# Altium PCB ArgoFCRev2.PcbDoc (part 6 of 6)
Units mm, origin at the board's own origin, x right, y up, seen from the top; angles counter-clockwise.
Board outline 140.21 x 119.63 mm, 4 copper layers (Top Layer, GND Plane, PWR Plane, Bottom Layer), stack 0.603 mm thick; 413 components, 223 nets, 1421 pads, 793 vias.
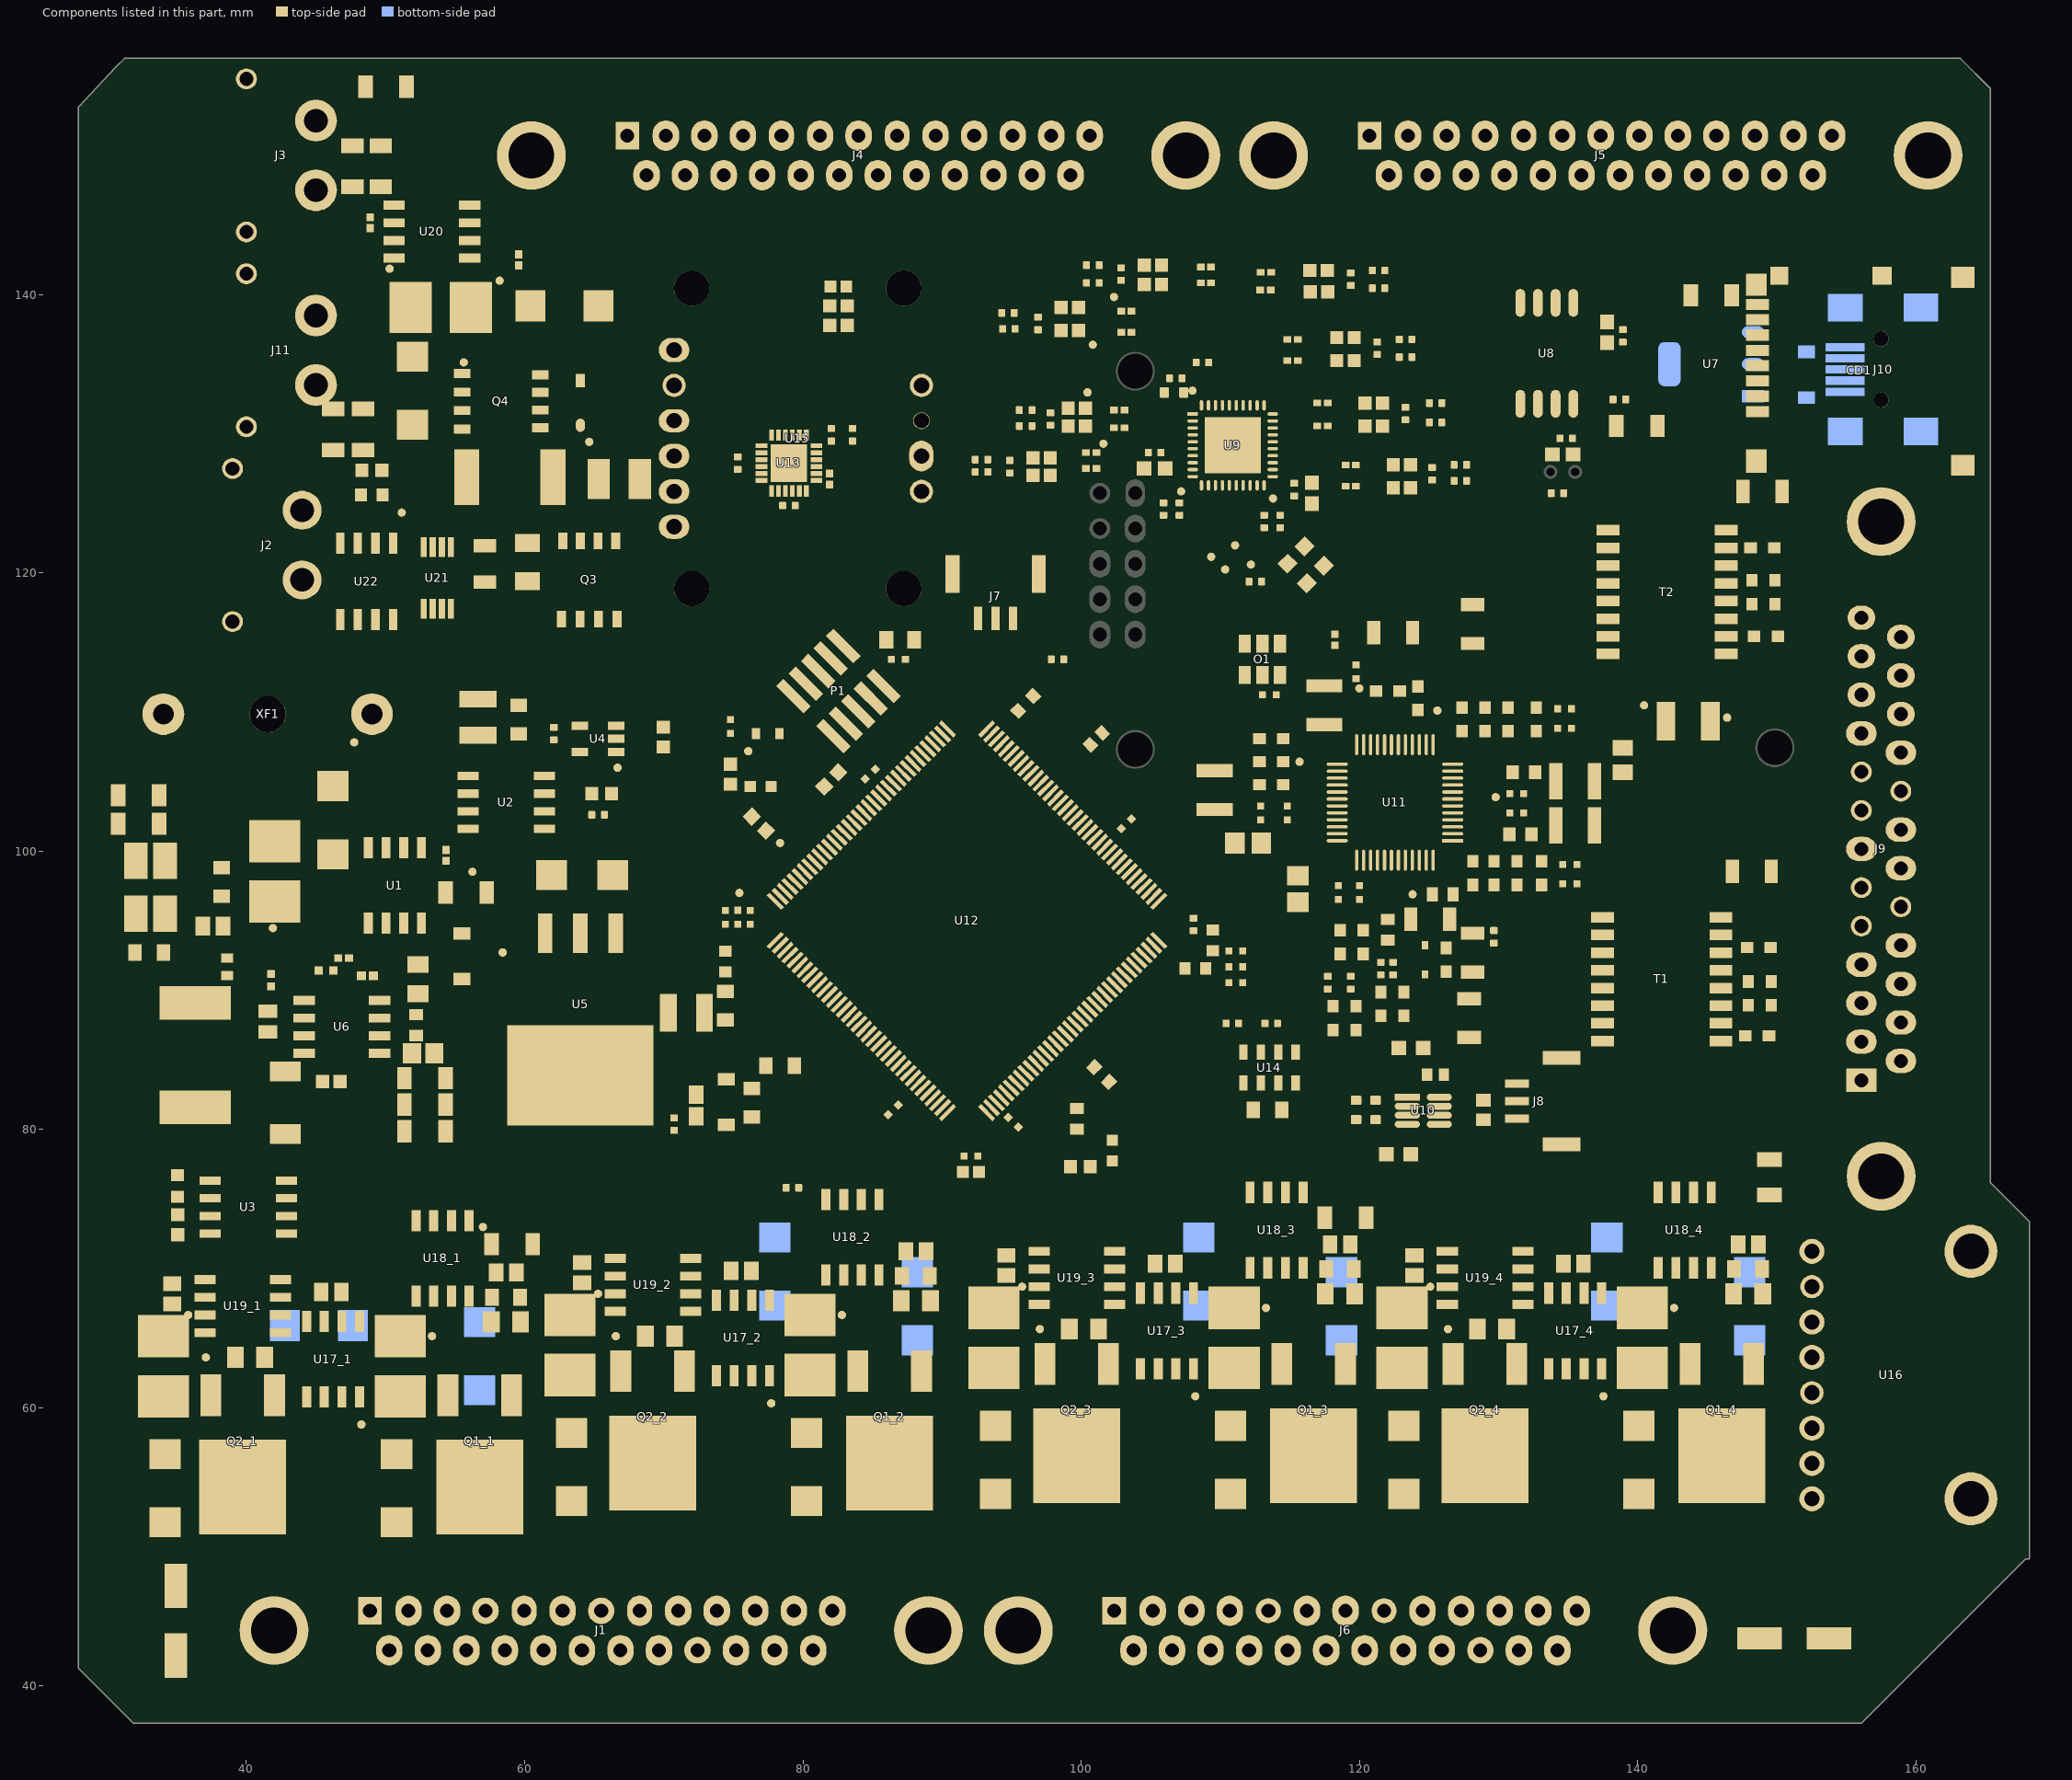
[diagram p7: the components of this part, seen from the top]

## Polygon pours and split planes (outlines as drawn) (continued)
GND on Top Layer "GND_L01_P727" (solid, remove dead copper, pour order 727): 155.293,69.215 161.798,69.215 162.306,68.707 162.306,56.388 161.925,56.007 155.194,56.007 154.813,56.388 154.813,68.675
LOAD_7 on Top Layer "LOAD_7_L01_P694" (solid, remove dead copper, pour order 694): 136.525,53.34 136.525,52.197 131.699,47.371 131.699,44.958 132.588,44.069 136.652,44.069 143.51,50.927 143.51,53.34
LOAD_1 on Top Layer "LOAD_1_L01_P690" (solid, remove dead copper, pour order 690): 60.325,52.959 60.325,50.673 64.008,46.99 64.008,44.704 63.373,44.069 59.436,44.069 58.674,44.831 58.674,46.101 54.61,50.165 54.61,52.959
LOAD_2 on Top Layer "LOAD_2_L01_P689" (solid, remove dead copper, pour order 689): 46.355,52.07 46.355,50.927 50.673,46.609 54.991,46.609 55.626,45.974 55.626,44.831 54.991,44.196 46.99,44.196 39.751,51.435 40.386,52.07 40.767,52.07
LOAD_7 on Top Layer "LOAD_7_L01_P615" (solid, remove dead copper, pour order 615): 142.494,59.817 142.367,59.69 142.367,55.499 141.859,54.991 136.779,54.991 136.525,54.737 136.525,50.292 136.906,49.911 148.717,49.911 149.606,50.8 149.606,59.69 149.479,59.817
LOAD_5 on Top Layer "LOAD_5_L01_P614" (solid, remove dead copper, pour order 614): 113.157,59.817 113.03,59.69 113.03,55.499 112.522,54.991 107.442,54.991 107.188,54.737 107.188,50.927 108.204,49.911 119.253,49.911 120.269,50.927 120.269,59.69 120.142,59.817
LOAD_1 on Top Layer "LOAD_1_L01_P613" (solid, remove dead copper, pour order 613): 53.213,57.785 53.086,57.658 53.086,53.467 52.578,52.959 47.498,52.959 47.244,52.705 47.244,50.927 48.895,49.276 58.928,49.276 60.325,50.673 60.325,57.658 60.198,57.785
LOAD_3 on Top Layer "LOAD_3_L01_P612" (solid, remove dead copper, pour order 612): 82.677,59.309 82.55,59.182 82.55,54.991 82.042,54.483 76.962,54.483 76.708,54.229 76.708,50.038 77.47,49.276 88.9,49.276 89.789,50.165 89.789,59.182 89.662,59.309
LOAD_8 on Top Layer "LOAD_8_L01_P611" (solid, remove dead copper, pour order 611): 125.603,59.817 125.222,59.436 125.222,55.245 122.174,55.245 121.793,54.864 121.793,50.927 123.19,49.53 132.207,49.53 135.636,52.959 135.636,59.563 135.382,59.817
LOAD_6 on Top Layer "LOAD_6_L01_P610" (solid, remove dead copper, pour order 610): 96.266,59.817 95.885,59.436 95.885,55.245 92.837,55.245 92.456,54.864 92.456,52.832 95.504,49.784 105.156,49.784 106.299,50.927 106.299,59.563 106.045,59.817
LOAD_2 on Top Layer "LOAD_2_L01_P609" (solid, remove dead copper, pour order 609): 36.322,57.785 35.941,57.404 35.941,53.213 32.893,53.213 32.766,53.086 32.766,50.927 33.909,49.784 45.212,49.784 46.355,50.927 46.355,57.531 46.101,57.785
LOAD_4 on Top Layer "LOAD_4_L01_P608" (solid, remove dead copper, pour order 608): 65.786,59.309 65.405,58.928 65.405,54.737 62.357,54.737 61.976,54.356 61.976,50.546 63.373,49.149 74.93,49.149 75.819,50.038 75.819,59.055 75.565,59.309
REG_SUPPLY_5V on Top Layer "REG_SUPPLY_5V_L01_P516" (solid, remove dead copper, pour order 516): 54.618,108.974 54.61,108.966 54.61,106.299 54.856,106.053 64.641,106.053 64.895,106.307 64.895,107.323 63.879,108.339 60.952,108.339 60.317,108.974
NetC13_2 on Top Layer "NETC13_2_L01_P721" (solid, remove dead copper, pour order 721): 29.21,85.09 29.21,85.852 29.972,86.614 32.385,86.614 33.909,85.09
STM32VDD on Top Layer "STM32VDD_L01_P646" (solid, remove dead copper, pour order 646): 57.658,79.248 58.42,78.486 67.437,78.486 71.247,82.296 71.247,83.185 57.658,83.185
REG_SUPPLY_5V on Top Layer "REG_SUPPLY_5V_L01_P509" (solid, remove dead copper, pour order 509): 29.21,100.838 29.21,87.63 38.608,87.63 39.624,88.646 39.624,91.059 39.497,91.186 32.893,91.186 32.893,100.584 32.639,100.838
STM32VDD on Top Layer "STM32VDD_L01_P517" (solid, remove dead copper, pour order 517): 63.246,96.139 64.77,96.139 64.897,96.012 64.897,92.202 65.405,91.694 71.374,91.694 71.374,82.296 57.658,82.296 57.658,91.313 58.039,91.694 62.484,91.694 63.119,92.329 63.119,96.012
NetC5_1 on Top Layer "NETC5_1_L01_P700" (solid, remove dead copper, pour order 700): 40.132,100.584 41.91,100.584 43.434,102.108 48.006,102.108 49.149,100.965 49.149,99.187 48.641,98.679 40.132,98.679
NetD13_1 on Top Layer "NETD13_1_L01_P662" (solid, remove dead copper, pour order 662): 53.848,128.397 54.483,129.032 58.293,129.032 58.674,128.651 58.674,123.063 58.547,122.936 58.547,121.412 58.42,121.285 55.88,121.285 55.753,121.412 55.753,125.095 53.848,127
FC_Batt on Top Layer "FC_BATT_L01_P702" (solid, remove dead copper, pour order 702): 52.959,121.158 52.959,122.809 52.959,124.333 52.324,124.968 51.308,124.968 50.927,124.587 50.927,123.444 52.451,121.92 52.451,121.158
FC_Batt on Top Layer "FC_BATT_L01_P656" (solid, remove dead copper, pour order 656): 50.8,136.652 54.229,136.652 55.245,135.636 59.436,135.636 59.817,135.255 59.817,129.54 54.483,129.54 54.102,129.921 54.102,132.588 52.705,132.588 50.8,134.493
FC_Batt on Top Layer "FC_BATT_L01_P710" (solid, remove dead copper, pour order 710): 30.988,140.081 29.591,138.684 29.591,106.045 29.845,105.791 36.576,105.791 41.783,110.998 41.783,121.158 43.434,122.809 44.45,122.809 47.371,125.73 47.371,128.016 43.053,132.334 43.053,134.493 46.736,138.176 46.736,140.081
FC_Batt on Top Layer "FC_BATT_L01_P658" (solid, pour order 658): 30.988,140.081 30.988,135.382 46.101,135.382 48.514,132.969 53.721,132.969 53.721,135.001 52.07,136.652 50.165,136.652 49.657,137.16 49.657,140.081
NetD14_2_1 on Top Layer "NETD14_2_1_L01_P544" (solid, remove dead copper, pour order 544): 69.596,65.532 69.596,62.484 70.739,61.341 72.263,61.341 72.517,61.595 72.517,65.405 72.009,65.913 69.977,65.913
NetD14_1_1 on Top Layer "NETD14_1_1_L01_P545" (solid, remove dead copper, pour order 545): 40.132,64.008 40.132,60.96 41.275,59.817 42.799,59.817 43.053,60.071 43.053,63.881 42.545,64.389 40.513,64.389
NetD14_3_1 on Top Layer "NETD14_3_1_L01_P546" (solid, remove dead copper, pour order 546): 100.076,66.04 100.076,62.992 101.219,61.849 102.743,61.849 102.997,62.103 102.997,65.913 102.489,66.421 100.457,66.421
NetD14_4_1 on Top Layer "NETD14_4_1_L01_P547" (solid, remove dead copper, pour order 547): 129.413,66.04 129.413,62.992 130.556,61.849 132.08,61.849 132.334,62.103 132.334,65.913 131.826,66.421 129.794,66.421
NetD14_2_1 on Top Layer "NETD14_2_1_L01_P564" (solid, remove dead copper, pour order 564): 82.042,71.628 80.137,71.628 79.883,71.374 79.883,69.088 80.264,68.707 82.042,68.707
NetD14_1_1 on Top Layer "NETD14_1_1_L01_P565" (solid, remove dead copper, pour order 565): 52.578,70.104 50.673,70.104 50.419,69.85 50.419,67.564 50.8,67.183 52.578,67.183
NetD14_3_1 on Top Layer "NETD14_3_1_L01_P566" (solid, remove dead copper, pour order 566): 112.522,72.136 110.617,72.136 110.363,71.882 110.363,69.596 110.744,69.215 112.522,69.215
NetD14_4_1 on Top Layer "NETD14_4_1_L01_P567" (solid, remove dead copper, pour order 567): 141.859,72.136 139.954,72.136 139.7,71.882 139.7,69.596 140.081,69.215 141.859,69.215
NetD13_1_1 on Top Layer "NETD13_1_1_L01_P605" (solid, remove dead copper, pour order 605): 55.118,66.929 57.785,66.929 58.42,66.294 58.42,64.77 59.817,63.373 59.817,59.69 58.166,59.69 56.007,61.849 56.007,64.643 54.991,65.659 54.356,66.294 54.356,68.834 55.118,68.834
NetD13_3_1 on Top Layer "NETD13_3_1_L01_P606" (solid, remove dead copper, pour order 606): 115.062,68.961 117.729,68.961 118.364,68.326 118.364,66.802 119.761,65.405 119.761,61.722 118.11,61.722 116.205,63.627 116.205,66.421 114.935,67.691 114.3,68.326 114.3,70.866 115.062,70.866
NetQ3_4 on Top Layer "NETQ3_4_L01_P660" (solid, remove dead copper, pour order 660): 61.087,128.905 62.992,128.905 63.119,128.778 63.119,121.793 62.992,121.666 61.849,121.666 61.849,123.571 61.087,124.333
NetQ3_5 on Top Layer "NETQ3_5_L01_P663" (solid, remove dead copper, pour order 663): 55.372,143.256 54.483,142.367 54.483,137.287 55.626,136.144 58.547,136.144 58.928,136.525 58.928,141.097 56.769,143.256
NetQ3_5 on Top Layer "NETQ3_5_L01_P670" (solid, remove dead copper, pour order 670): 54.483,118.237 54.483,116.713 55.245,115.951 67.056,115.951 67.056,118.237
GND on Top Layer "GND_L01_P654" (solid, pour order 654): 32.131,104.013 31.313,104.831 29.083,104.831 29.083,101.148 31.298,101.148 32.131,101.981
LOAD_8 on Top Layer "LOAD_8_L01_P693" (solid, remove dead copper, pour order 693): 121.793,50.927 123.19,49.53 123.19,44.831 123.952,44.069 127.889,44.069 128.778,44.958 128.778,50.927
LOAD_5 on Top Layer "LOAD_5_L01_P692" (solid, remove dead copper, pour order 692): 120.269,51.562 120.269,44.958 119.253,43.942 115.824,43.942 114.808,44.958 114.808,51.562
LOAD_4 on Top Layer "LOAD_4_L01_P691" (solid, remove dead copper, pour order 691): 66.929,50.927 66.929,44.831 67.691,44.069 71.628,44.069 72.39,44.831 72.39,50.927
LOAD_6 on Top Layer "LOAD_6_L01_P681" (solid, remove dead copper, pour order 681): 102.616,49.911 106.807,45.72 106.807,44.831 107.569,44.069 111.125,44.069 112.014,44.958 112.014,46.609 110.363,48.26 108.966,48.26 106.299,50.927 106.299,52.451 102.616,52.451
STM32VDD on Top Layer "STM32VDD_L01_P505" (solid, remove dead copper, pour order 505): 88.392,82.169 89.408,83.185 89.916,82.677 88.9,81.661
GND on Top Layer "GND_L01_P680" (solid, remove dead copper, pour order 680): 74.168,94.996 76.454,94.996 76.581,94.869 76.581,93.472 75.438,92.329 74.041,92.329 73.914,92.456 73.914,94.742
GND on Top Layer "GND_L01_P507" (solid, pour order 507): 115.697,80.772 116.586,81.661 116.586,85.09 115.57,86.106 115.062,86.106 115.062,84.328 114.681,83.947 113.792,83.947 113.792,81.026 114.046,80.772
"GSE PWR" on Top Layer "GSE_PWR_L01_P671" (solid, remove dead copper, pour order 671): 59.309,140.335 59.563,140.589 62.611,140.589 63.119,140.081 63.119,138.303 62.611,137.795 59.563,137.795 59.309,138.049
NetD13_1 on Top Layer "NETD13_1_L01_P655" (solid, remove dead copper, pour order 655): 60.452,133.858 62.611,133.858 63.754,132.715 64.77,132.715 64.77,136.652 64.389,137.033 60.833,137.033 60.452,136.652
GND on Top Layer "GND_L01_P650" (solid, remove dead copper, pour order 650): 54.61,109.982 60.198,109.982 60.325,110.109 60.325,112.649 59.944,113.03 54.991,113.03 54.61,112.649
VGND1_4 on Top Layer "VGND1_4_L01_P531" (solid, remove dead copper, pour order 531): 137.033,63.5 137.033,60.833 137.414,60.452 143.891,60.452 144.526,61.087 144.526,64.389 138.049,64.389
VGND2_4 on Top Layer "VGND2_4_L01_P543" (solid, remove dead copper, pour order 543): 125.603,67.818 127.127,67.818 127.508,67.437 127.508,61.849 127,61.341 121.158,61.341 121.158,64.262 121.412,64.516 125.603,64.516
GND on Top Layer "GND_L01_P537" (solid, remove dead copper, pour order 537): 135.763,62.103 136.525,62.103 136.525,63.373 140.335,67.183 140.335,68.453 137.795,70.993 135.763,70.993
GND on Top Layer "GND_L01_P581" (solid, remove dead copper, pour order 581): 148.209,72.39 148.209,67.437 149.098,67.437 149.987,68.326 149.987,71.628 149.225,72.39
GND on Top Layer "GND_L01_P553" (solid, remove dead copper, pour order 553): 123.825,69.088 132.461,69.088 132.588,68.961 132.588,67.183 132.461,67.056 128.778,67.056 128.778,65.024 128.651,64.897 128.016,64.897 127.889,65.024 127.889,67.945 127.508,68.326 123.825,68.326
GND on Top Layer "GND_L01_P561" (solid, remove dead copper, pour order 561): 122.047,70.485 122.555,70.485 123.063,69.977 124.587,69.977 124.587,65.659 121.031,65.659 121.031,68.453 121.539,68.961 121.539,69.977
24Vin on Top Layer "24VIN_L01_P573" (solid, remove dead copper, pour order 573): 144.78,76.2 144.78,69.469 145.034,69.215 147.574,69.215 147.828,69.469 147.828,72.517 147.701,72.644 146.304,72.644 146.304,75.438 145.542,76.2
VGND1_3 on Top Layer "VGND1_3_L01_P530" (solid, remove dead copper, pour order 530): 107.696,63.5 107.696,60.833 108.077,60.452 114.554,60.452 115.189,61.087 115.189,64.389 108.712,64.389
VGND2_3 on Top Layer "VGND2_3_L01_P542" (solid, remove dead copper, pour order 542): 96.266,67.818 97.79,67.818 98.171,67.437 98.171,61.849 97.663,61.341 91.821,61.341 91.821,64.262 92.075,64.516 96.266,64.516
GND on Top Layer "GND_L01_P536" (solid, remove dead copper, pour order 536): 106.426,62.103 107.188,62.103 107.188,63.373 110.998,67.183 110.998,68.453 108.458,70.993 106.426,70.993
GND on Top Layer "GND_L01_P580" (solid, remove dead copper, pour order 580): 118.872,74.422 118.872,67.437 119.38,67.437 121.031,69.088 121.031,74.422
GND on Top Layer "GND_L01_P552" (solid, remove dead copper, pour order 552): 94.488,69.088 103.124,69.088 103.251,68.961 103.251,67.183 103.124,67.056 99.441,67.056 99.441,65.024 99.314,64.897 98.679,64.897 98.552,65.024 98.552,67.945 98.171,68.326 94.488,68.326
GND on Top Layer "GND_L01_P560" (solid, remove dead copper, pour order 560): 92.71,70.485 93.218,70.485 93.726,69.977 95.25,69.977 95.25,65.659 91.694,65.659 91.694,68.453 92.202,68.961 92.202,69.977
24Vin on Top Layer "24VIN_L01_P572" (solid, remove dead copper, pour order 572): 115.443,76.2 115.443,69.469 115.697,69.215 118.237,69.215 118.491,69.469 118.491,72.517 118.364,72.644 116.967,72.644 116.967,75.438 116.205,76.2
VGND1_1 on Top Layer "VGND1_1_L01_P529" (solid, remove dead copper, pour order 529): 47.752,61.468 47.752,58.801 48.133,58.42 54.61,58.42 55.245,59.055 55.245,62.357 48.768,62.357
VGND2_1 on Top Layer "VGND2_1_L01_P541" (solid, remove dead copper, pour order 541): 36.322,65.786 37.846,65.786 38.227,65.405 38.227,59.817 37.719,59.309 32.258,59.309 32.258,62.484 36.322,62.484
GND on Top Layer "GND_L01_P535" (solid, remove dead copper, pour order 535): 46.482,60.071 47.244,60.071 47.244,61.341 51.054,65.151 51.054,66.421 48.514,68.961 46.482,68.961
GND on Top Layer "GND_L01_P579" (solid, remove dead copper, pour order 579): 58.928,70.358 58.928,65.405 59.817,65.405 60.325,65.913 60.325,69.977 59.944,70.358
GND on Top Layer "GND_L01_P551" (solid, remove dead copper, pour order 551): 34.544,67.056 43.18,67.056 43.307,66.929 43.307,65.151 43.18,65.024 39.497,65.024 39.497,62.992 39.37,62.865 38.735,62.865 38.608,62.992 38.608,65.913 38.227,66.294 34.544,66.294
24Vin on Top Layer "24VIN_L01_P571" (solid, remove dead copper, pour order 571): 55.499,74.168 55.499,67.437 55.753,67.183 58.293,67.183 58.547,67.437 58.547,70.485 58.42,70.612 58.42,72.009 56.261,74.168
GND on Top Layer "GND_L01_P534" (solid, remove dead copper, pour order 534): 46.482,60.071 47.244,60.071 47.244,61.341 51.054,65.151 51.054,66.421 48.514,68.961 46.482,68.961
GND on Top Layer "GND_L01_P578" (solid, remove dead copper, pour order 578): 58.928,72.517 58.928,65.405 60.325,65.405 60.833,65.913 60.833,72.517
GND on Top Layer "GND_L01_P550" (solid, remove dead copper, pour order 550): 34.544,67.056 43.18,67.056 43.307,66.929 43.307,65.151 43.18,65.024 39.497,65.024 39.497,62.992 39.37,62.865 38.735,62.865 38.608,62.992 38.608,65.913 38.227,66.294 34.544,66.294
24Vin on Top Layer "24VIN_L01_P570" (solid, remove dead copper, pour order 570): 55.499,74.168 55.499,67.437 55.753,67.183 58.293,67.183 58.547,67.437 58.547,70.485 58.42,70.612 57.023,70.612 57.023,73.406 56.261,74.168
GND on Top Layer "GND_L01_P583" (solid, remove dead copper, pour order 583): 148.209,72.39 148.209,67.437 149.098,67.437 149.479,67.818 149.479,72.136 149.225,72.39
GND on Top Layer "GND_L01_P582" (solid, remove dead copper, pour order 582): 118.872,72.39 118.872,67.437 119.761,67.437 120.142,67.818 120.142,72.136 119.888,72.39
GND on Top Layer "GND_L01_P577" (solid, remove dead copper, pour order 577): 88.392,71.882 88.392,66.929 89.281,66.929 90.424,68.072 90.424,70.866 89.408,71.882
GND on Top Layer "GND_L01_P576" (solid, remove dead copper, pour order 576): 58.928,70.358 58.928,65.024 59.944,65.024 60.325,65.405 60.325,69.977 59.944,70.358
GND on Top Layer "GND_L01_P555" (solid, remove dead copper, pour order 555): 123.825,69.088 132.461,69.088 132.588,68.961 132.588,67.183 132.461,67.056 128.778,67.056 128.778,65.024 128.651,64.897 128.016,64.897 127.889,65.024 127.889,67.945 127.508,68.326 123.825,68.326
GND on Top Layer "GND_L01_P554" (solid, remove dead copper, pour order 554): 94.488,69.088 103.124,69.088 103.251,68.961 103.251,67.183 103.124,67.056 99.441,67.056 99.441,65.024 99.314,64.897 98.679,64.897 98.552,65.024 98.552,67.945 98.171,68.326 94.488,68.326
GND on Top Layer "GND_L01_P549" (solid, remove dead copper, pour order 549): 64.008,68.58 72.644,68.58 72.771,68.453 72.771,66.675 72.644,66.548 68.961,66.548 68.961,64.516 68.834,64.389 68.199,64.389 68.072,64.516 68.072,67.437 67.691,67.818 64.008,67.818
GND on Top Layer "GND_L01_P548" (solid, remove dead copper, pour order 548): 34.544,67.056 43.18,67.056 43.307,66.929 43.307,65.151 43.18,65.024 39.497,65.024 39.497,62.992 39.37,62.865 38.735,62.865 38.608,62.992 38.608,65.913 38.227,66.294 34.544,66.294
Temp1 on Top Layer "TEMP1_L01_P647" (solid, remove dead copper, pour order 647): 71.755,81.534 71.882,81.661 76.835,81.661 77.216,81.28 77.216,80.391 75.692,80.391 75.184,79.883 72.263,79.883 71.501,80.645 70.485,80.645 70.485,81.026 70.993,81.534
GND on Top Layer "GND_L01_P563" (solid, remove dead copper, pour order 563): 122.047,70.485 122.555,70.485 123.063,69.977 124.587,69.977 124.587,65.659 121.031,65.659 121.031,68.453 121.539,68.961 121.539,69.977
GND on Top Layer "GND_L01_P539" (solid, remove dead copper, pour order 539): 135.763,62.103 136.525,62.103 136.525,63.373 140.335,67.183 140.335,68.453 137.795,70.993 135.763,70.993
24Vin on Top Layer "24VIN_L01_P575" (solid, remove dead copper, pour order 575): 144.78,76.2 144.78,69.469 145.034,69.215 147.574,69.215 147.828,69.469 147.828,72.517 147.701,72.644 146.304,72.644 146.304,75.438 145.542,76.2
GND on Top Layer "GND_L01_P562" (solid, remove dead copper, pour order 562): 92.71,70.485 93.218,70.485 93.726,69.977 95.25,69.977 95.25,65.659 91.694,65.659 91.694,68.453 92.202,68.961 92.202,69.977
GND on Top Layer "GND_L01_P538" (solid, remove dead copper, pour order 538): 106.426,62.103 107.188,62.103 107.188,63.373 110.998,67.183 110.998,68.453 108.458,70.993 106.426,70.993
24Vin on Top Layer "24VIN_L01_P574" (solid, remove dead copper, pour order 574): 115.443,76.2 115.443,69.469 115.697,69.215 118.237,69.215 118.491,69.469 118.491,72.517 118.364,72.644 118.11,72.644 118.11,74.295 116.205,76.2
VGND1_2 on Top Layer "VGND1_2_L01_P528" (solid, remove dead copper, pour order 528): 77.216,62.992 77.216,60.325 77.597,59.944 84.074,59.944 84.709,60.579 84.709,63.881 78.232,63.881
GND on Top Layer "GND_L01_P557" (solid, remove dead copper, pour order 557): 62.23,69.977 62.738,69.977 63.246,69.469 64.77,69.469 64.77,65.151 61.214,65.151 61.214,67.945 61.722,68.453 61.722,69.469
GND on Top Layer "GND_L01_P533" (solid, remove dead copper, pour order 533): 75.946,61.595 76.708,61.595 76.708,62.865 80.518,66.675 80.518,67.945 77.978,70.485 75.946,70.485
24Vin on Top Layer "24VIN_L01_P569" (solid, remove dead copper, pour order 569): 84.963,75.692 84.963,68.961 85.217,68.707 87.757,68.707 88.011,68.961 88.011,72.009 87.884,72.136 86.487,72.136 86.487,74.93 85.725,75.692
GND on Top Layer "GND_L01_P532" (solid, remove dead copper, pour order 532): 46.482,60.071 47.244,60.071 47.244,61.341 51.054,65.151 51.054,66.421 48.514,68.961 46.482,68.961
24Vin on Top Layer "24VIN_L01_P568" (solid, remove dead copper, pour order 568): 55.499,74.168 55.499,67.437 55.753,67.183 58.293,67.183 58.547,67.437 58.547,70.485 58.42,70.612 57.023,70.612 57.023,73.406 56.261,74.168
REG_SUPPLY_5V on Top Layer "REG_SUPPLY_5V_L01_P524" (solid, remove dead copper, pour order 524): 56.515,99.822 55.88,99.187 55.88,94.361 58.039,92.202 61.849,92.202 62.23,92.583 62.23,96.901 62.484,97.155 63.119,97.155 63.119,99.822
GND on Top Layer "GND_L01_P518" (solid, remove dead copper, pour order 518): 72.009,97.79 70.358,99.441 66.294,99.441 65.913,99.06 65.913,92.71 66.421,92.202 71.628,92.202 72.009,92.583
24Vin on Top Layer "24VIN_L01_P511" (solid, remove dead copper, pour order 511): 51.435,87.249 50.673,86.487 50.673,84.963 47.879,82.169 47.879,80.01 48.895,78.994 52.197,78.994 52.578,79.375 52.578,87.249
24Vin on Top Layer "24VIN_L01_P521" (solid, remove dead copper, pour order 521): 40.259,97.917 39.751,97.409 39.751,94.869 41.656,92.964 47.974,92.964 49.149,94.139 49.149,95.631 48.546,96.234 45.498,96.234 43.815,97.917
GND on Top Layer "GND_L01_P520" (solid, remove dead copper, pour order 520): 33.274,100.584 33.401,100.457 33.401,92.075 33.528,91.948 36.957,91.948 37.211,92.202 37.211,97.028 35.814,98.425 35.814,100.076 35.306,100.584
5V on Top Layer "5V_L01_P515" (solid, remove dead copper, pour order 515): 65.786,107.315 65.913,107.442 67.818,107.442 69.088,106.172 69.088,104.521 68.072,103.505 65.913,103.505 65.786,103.632
GND on Top Layer "GND_L01_P510" (solid, pour order 510): 53.467,87.249 56.515,87.249 57.023,86.741 57.023,80.518 55.499,78.994 53.848,78.994 53.467,79.375
STM32VDD on Top Layer "STM32VDD_L01_P508" (solid, remove dead copper, pour order 508): 112.903,80.772 113.157,81.026 113.157,83.82 111.506,83.82 110.363,82.677 110.363,81.534 111.125,80.772
GND on Top Layer "GND_L01_P504" (solid, pour order 504): 77.851,111.887 77.851,107.823 79.375,107.823 79.375,110.744 78.232,111.887
GND on GND Plane "GND_L02_P696" (solid, remove dead copper, pour order 696): 36.195,156.464 34.544,156.464 32.258,154.178 32.258,43.434 36.957,38.735 156.845,38.735 162.306,44.196 162.306,81.661 142.113,81.661 142.113,127.127 163.83,127.127 163.703,127.254 163.703,151.257 158.75,156.464
GND on GND Plane "GND_L02_P733" (solid, remove dead copper, pour order 733): 32.258,107.696 29.083,104.521 29.083,101.727 32.258,98.552 34.671,98.552 34.671,107.696
CHASSIS on GND Plane "chassis" (solid, pour order 491): 160.782,124.46 146.05,124.46 146.05,85.344 145.034,84.328 160.782,84.328
NetD13_4_1 on Bottom Layer "NETD13_4_1_L04_P766" (solid, remove dead copper, pour order 766): 149.225,65.913 149.352,65.786 149.352,63.881 149.225,63.754 145.923,63.754 145.542,64.135 145.542,65.659 145.796,65.913
NetD13_2_1 on Bottom Layer "NETD13_2_1_L04_P768" (solid, remove dead copper, pour order 768): 89.408,65.913 89.535,65.786 89.535,63.881 89.408,63.754 86.106,63.754 85.852,64.008 85.852,65.786 85.979,65.913
NetD13_3_1 on Bottom Layer "NETD13_3_1_L04_P767" (solid, remove dead copper, pour order 767): 119.761,65.913 119.888,65.786 119.888,63.881 119.761,63.754 116.459,63.754 116.205,64.008 116.205,65.786 116.332,65.913
NetD13_1_1 on Bottom Layer "NETD13_1_1_L04_P765" (solid, remove dead copper, pour order 765): 55.753,60.071 55.626,60.198 55.626,62.865 56.007,63.246 57.531,63.246 57.912,62.865 57.912,60.198 57.785,60.071
NetD14_1_1 on Bottom Layer "NETD14_1_1_L04_P633" (solid, remove dead copper, pour order 633): 40.005,64.008 40.259,64.262 45.085,64.262 50.8,69.977 51.308,69.977 51.689,69.596 51.689,64.389 48.514,61.214 41.402,61.214 41.021,60.833 40.259,60.833 40.005,61.087
GND on Bottom Layer "GND_L04_P764" (solid, remove dead copper, pour order 764): 146.939,68.707 149.987,68.707 150.241,68.961 150.241,71.247 149.987,71.501 147.574,71.501 146.939,70.866
24Vin on Bottom Layer "24VIN_L04_P616" (solid, remove dead copper, pour order 616): 55.245,72.39 55.245,69.469 55.626,69.088 56.642,69.088 57.023,69.469 57.023,71.882 56.515,72.39
24Vin on Bottom Layer "24VIN_L04_P760" (solid, remove dead copper, pour order 760): 115.078,75.057 115.078,71.374 115.332,71.12 116.729,71.12 116.856,71.247 116.856,72.644 116.856,74.93 116.729,75.057
24Vin on Bottom Layer "24VIN_L04_P622" (solid, remove dead copper, pour order 622): 144.415,75.057 144.415,71.374 144.669,71.12 146.066,71.12 146.193,71.247 146.193,72.644 146.193,74.93 146.066,75.057
24Vin on Bottom Layer "24VIN_L04_P729" (solid, remove dead copper, pour order 729): 34.29,55.753 38.1,55.753 38.1,53.34 47.879,43.561 47.879,39.497 38.227,39.497 34.29,43.434
24Vin on Bottom Layer "24VIN_L04_P644" (solid, pour order 644): 28.448,76.2 28.448,43.688 34.417,37.719 38.735,37.719 38.735,76.2
"GSE PWR" on Bottom Layer "GSE_PWR_L04_P674" (solid, pour order 674): 30.604,155.956 53.086,155.956 63.754,145.288 63.754,137.795 49.784,137.795 46.609,140.97 30.988,140.97 30.473,141.485
STM32VDD on Bottom Layer "STM32VDD_L04_P640" (solid, remove dead copper, pour order 640): 39.751,72.898 39.37,72.517 39.37,67.818 39.624,67.564 45.339,67.564 46.101,68.326 46.101,71.247 44.45,72.898
24Vin on Bottom Layer "24VIN_L04_P499" (solid, remove dead copper, pour order 499): 34.671,43.414 34.671,37.719 150.114,37.719 150.114,43.533
NetC13_2 on Bottom Layer "NETC13_2_L04_P720" (solid, remove dead copper, pour order 720): 29.972,86.614 29.591,86.233 29.591,85.471 29.972,85.09 32.525,85.09 32.893,85.501 32.893,86.233 32.512,86.614
STM32VDD on Bottom Layer "STM32VDD_L04_P498" (solid, pour order 498): 69.723,112.395 74.549,107.569 74.549,101.346 72.136,98.933 72.136,84.328 66.802,78.994 61.087,78.994 60.198,79.883 60.198,110.744 61.849,112.395
REG_SUPPLY_5V on Bottom Layer "REG_SUPPLY_5V_L04_P527" (solid, remove dead copper, pour order 527): 59.563,98.933 59.563,89.916 58.166,88.519 55.753,88.519 49.022,95.25 43.591,95.25 36.576,87.63 30.48,87.63 29.337,88.773 29.337,98.298 30.988,99.949 58.481,99.949
24Vin on Bottom Layer "24VIN_L04_P525" (solid, remove dead copper, pour order 525): 44.562,94.615 28.448,76.316 28.448,73.406 44.577,73.406 53.594,82.423 53.594,88.9 47.879,94.615
GND on Bottom Layer "GND_L04_P753" (solid, remove dead copper, pour order 753): 153.67,136.652 153.543,136.525 153.543,135.255 153.67,135.128 157.099,135.128 157.48,135.509 157.48,136.144 156.972,136.652
FC_Batt on Bottom Layer "FC_BATT_L04_P757" (solid, remove dead copper, pour order 757): 42.291,135.382 47.117,135.382 48.133,136.398 48.133,138.557 46.482,140.208 42.545,140.208 42.291,139.954
5V on Bottom Layer "5V_L04_P711" (solid, remove dead copper, pour order 711): 109.093,132.461 109.855,131.699 109.855,124.206 108.966,123.317 105.537,123.317 104.775,124.079 104.775,131.191 106.045,132.461
STM32VDD on Bottom Layer "STM32VDD_L04_P755" (solid, remove dead copper, pour order 755): 141.351,137.16 140.335,136.144 140.335,133.985 141.478,132.842 142.875,132.842 144.145,134.112 148.717,134.112 149.225,134.62 149.225,135.382 148.717,135.89 144.018,135.89 142.748,137.16
GND on Bottom Layer "GND_L04_P754" (solid, remove dead copper, pour order 754): 148.971,133.223 149.098,133.096 149.098,132.207 148.971,132.08 147.955,132.08 147.32,131.445 144.272,131.445 144.018,131.699 144.018,132.08 144.272,132.334 146.558,132.334 147.447,133.223
NetC24_2 on Bottom Layer "NETC24_2_L04_P752" (solid, remove dead copper, pour order 752): 148.336,137.922 148.082,137.668 148.082,136.906 148.463,136.525 150.241,136.525 151.384,135.382 152.781,135.382 153.035,135.636 153.035,136.779 151.892,137.922
USB_5V on Bottom Layer "USB_5V_L04_P751" (solid, remove dead copper, pour order 751): 156.147,133.096 156.147,132.715 155.511,132.08 153.924,132.08 153.035,131.191 152.209,131.191 151.511,131.889 151.511,132.969 151.638,133.096
24Vin on Bottom Layer "24VIN_L04_P749" (solid, remove dead copper, pour order 749): 30.607,77.216 40.132,77.216 40.132,73.914 38.354,72.136 38.354,72.009 30.734,72.009 30.607,72.136
NetC5_1 on Bottom Layer "NETC5_1_L04_P719" (solid, remove dead copper, pour order 719): 45.847,113.157 53.721,113.157 54.61,112.268 54.61,105.791 51.181,102.362 36.449,102.362 36.449,103.759
GND on Bottom Layer "GND_L04_P709" (solid, remove dead copper, pour order 709): 70.358,156.083 66.421,152.146 66.421,148.59 70.993,144.018 151.384,144.018 155.067,147.701 155.067,152.908 151.892,156.083
FC_Batt on Bottom Layer "FC_BATT_L04_P705" (solid, remove dead copper, pour order 705): 19 vertices, not listed, extent 29.591,105.918 52.705,140.081
STM32VDD on Bottom Layer "STM32VDD_L04_P738" (solid, remove dead copper, pour order 738): 60.198,89.662 57.658,87.122 57.658,79.248 58.42,78.486 67.056,78.486 72.136,83.566 72.136,89.662
GND on Bottom Layer "GND_L04_P728" (solid, remove dead copper, pour order 728): 155.279,69.215 161.798,69.215 162.306,68.707 162.306,56.388 161.925,56.007 155.194,56.007 154.813,56.388 154.813,68.691
NetD14_4_1 on Bottom Layer "NETD14_4_1_L04_P635" (solid, remove dead copper, pour order 635): 129.286,66.04 129.54,66.294 135.382,66.294 139.7,70.612 139.7,71.882 139.954,72.136 140.589,72.136 140.97,71.755 140.97,66.421 137.795,63.246 130.683,63.246 130.302,62.865 129.54,62.865 129.286,63.119
NetD14_2_1 on Bottom Layer "NETD14_2_1_L04_P632" (solid, remove dead copper, pour order 632): 69.469,65.532 69.723,65.786 76.073,65.786 80.01,69.723 80.01,71.247 80.264,71.501 80.772,71.501 81.153,71.12 81.153,65.913 77.978,62.738 70.866,62.738 70.485,62.357 69.723,62.357 69.469,62.611
GND on Bottom Layer "GND_L04_P725" (solid, remove dead copper, pour order 725): 56.642,67.056 59.563,69.977 63.373,69.977 63.881,69.469 63.881,68.072 60.706,64.897 56.896,64.897 56.642,65.151
GND on Bottom Layer "GND_L04_P724" (solid, remove dead copper, pour order 724): 89.408,72.39 87.122,70.104 87.122,68.707 88.773,67.056 101.727,67.056 101.981,67.31 101.981,69.088 101.727,69.342 95.885,69.342 92.837,72.39
GND on Bottom Layer "GND_L04_P722" (solid, remove dead copper, pour order 722): 119.253,72.39 117.729,70.866 117.729,68.58 119.253,67.056 131.826,67.056 132.08,67.31 132.08,69.088 131.826,69.342 125.984,69.342 122.936,72.39
NetC5_1 on Bottom Layer "NETC5_1_L04_P707" (solid, remove dead copper, pour order 707): 32.766,101.219 33.147,100.838 49.657,100.838 52.451,103.632 52.451,105.283 32.766,105.283
LOAD_2 on Bottom Layer "LOAD_2_L04_P629" (solid, remove dead copper, pour order 629): 41.783,57.785 46.101,57.785 46.355,57.531 46.355,50.927 44.704,49.276 43.18,49.276 41.656,50.8 41.656,57.658
NetD13_2 on Bottom Layer "NETD13_2_L04_P718" (solid, remove dead copper, pour order 718): 65.278,130.302 66.167,129.413 66.167,123.698 66.548,123.317 66.548,121.666 63.754,121.666 63.627,121.793 63.627,129.413 64.516,130.302
NetQ3_5 on Bottom Layer "NETQ3_5_L04_P717" (solid, remove dead copper, pour order 717): 62.23,121.031 66.929,121.031 67.183,121.285 67.183,128.143 68.834,128.143 68.834,116.332 66.548,114.046 57.912,114.046 54.229,117.729 54.229,121.031
NetQ3_5 on Bottom Layer "NETQ3_5_L04_P716" (solid, remove dead copper, pour order 716): 59.817,137.414 59.944,137.287 59.944,136.398 56.515,132.969 56.515,116.459 56.261,116.205 55.753,116.205 54.229,117.729 54.229,124.079 50.927,127.381 50.927,136.779 51.562,137.414
NetD13_1 on Bottom Layer "NETD13_1_L04_P675" (solid, remove dead copper, pour order 675): 64.77,131.699 64.77,136.906 64.389,137.287 61.722,137.287 56.896,132.461 56.896,125.857 57.404,125.349 58.42,125.349
NetD14_3_1 on Bottom Layer "NETD14_3_1_L04_P634" (solid, remove dead copper, pour order 634): 99.949,66.04 100.203,66.294 106.045,66.294 110.363,70.612 110.363,71.628 110.744,72.009 111.252,72.009 111.633,71.628 111.633,66.421 108.458,63.246 101.346,63.246 100.965,62.865 100.203,62.865 99.949,63.119
LOAD_7 on Bottom Layer "LOAD_7_L04_P688" (solid, remove dead copper, pour order 688): 136.525,52.197 131.699,47.371 131.699,44.958 132.588,44.069 136.652,44.069 142.748,50.165 142.748,52.197
LOAD_8 on Bottom Layer "LOAD_8_L04_P687" (solid, remove dead copper, pour order 687): 128.778,51.816 128.778,44.958 127.889,44.069 123.952,44.069 123.19,44.831 123.19,51.816
LOAD_5 on Bottom Layer "LOAD_5_L04_P686" (solid, remove dead copper, pour order 686): 114.808,52.07 114.808,44.958 115.824,43.942 119.253,43.942 120.269,44.958 120.269,49.53 120.269,52.07
LOAD_4 on Bottom Layer "LOAD_4_L04_P685" (solid, remove dead copper, pour order 685): 66.929,50.419 66.929,44.831 67.691,44.069 71.628,44.069 72.39,44.831 72.39,50.419
LOAD_1 on Bottom Layer "LOAD_1_L04_P684" (solid, remove dead copper, pour order 684): 55.626,50.673 55.626,49.149 58.674,46.101 58.674,44.831 59.436,44.069 63.373,44.069 64.008,44.704 64.008,46.99 60.325,50.673
LOAD_2 on Bottom Layer "LOAD_2_L04_P683" (solid, remove dead copper, pour order 683): 41.91,52.578 44.704,52.578 50.673,46.609 54.991,46.609 55.626,45.974 55.626,44.831 54.991,44.196 48.26,44.196 41.91,50.546
LOAD_6 on Bottom Layer "LOAD_6_L04_P682" (solid, remove dead copper, pour order 682): 102.616,52.705 106.299,52.705 106.299,50.927 108.966,48.26 110.363,48.26 112.014,46.609 112.014,44.958 111.125,44.069 107.569,44.069 106.68,44.958 106.68,45.847 102.616,49.911
LOAD_6 on Bottom Layer "LOAD_6_L04_P630" (solid, remove dead copper, pour order 630): 96.266,59.817 106.045,59.817 106.299,59.563 106.299,50.927 105.156,49.784 96.647,49.784 95.885,50.546 95.885,55.245 95.885,59.436
LOAD_8 on Bottom Layer "LOAD_8_L04_P631" (solid, remove dead copper, pour order 631): 125.603,59.817 135.382,59.817 135.636,59.563 135.636,52.959 132.207,49.53 123.19,49.53 121.793,50.927 121.793,54.864 122.174,55.245 125.222,55.245 125.222,59.436
LOAD_7 on Bottom Layer "LOAD_7_L04_P627" (solid, remove dead copper, pour order 627): 136.525,54.737 136.525,50.292 136.906,49.911 148.717,49.911 149.606,50.8 149.606,59.69 149.479,59.817 142.494,59.817 142.367,59.69 142.367,55.499 141.859,54.991 136.779,54.991
LOAD_5 on Bottom Layer "LOAD_5_L04_P626" (solid, remove dead copper, pour order 626): 107.188,54.737 107.188,50.927 108.204,49.911 119.253,49.911 120.269,50.927 120.269,59.69 120.142,59.817 113.157,59.817 113.03,59.69 113.03,55.499 112.522,54.991 107.442,54.991
LOAD_1 on Bottom Layer "LOAD_1_L04_P625" (solid, remove dead copper, pour order 625): 47.244,52.705 47.244,50.927 48.895,49.276 58.928,49.276 60.325,50.673 60.325,57.658 60.198,57.785 53.213,57.785 53.086,57.658 53.086,53.467 52.578,52.959 47.498,52.959
LOAD_3 on Bottom Layer "LOAD_3_L04_P624" (solid, remove dead copper, pour order 624): 82.55,54.991 82.55,49.276 88.9,49.276 89.789,50.165 89.789,59.182 89.662,59.309 86.868,59.309
LOAD_4 on Bottom Layer "LOAD_4_L04_P628" (solid, remove dead copper, pour order 628): 65.786,59.309 75.565,59.309 75.819,59.055 75.819,50.038 74.93,49.149 63.373,49.149 61.976,50.546 61.976,54.356 62.357,54.737 65.405,54.737 65.405,58.928
24Vin on Bottom Layer "24VIN_L04_P617" (solid, remove dead copper, pour order 617): 84.963,74.295 84.963,70.866 85.217,70.612 85.852,70.612 86.36,71.12 86.36,72.263 86.36,74.168 86.233,74.295
24Vin on PWR Plane "24VIN_L03_P585" (solid, remove dead copper, pour order 585): 115.624,74.405 115.37,74.151 115.37,55.736 117.91,55.736 117.91,74.151 117.656,74.405
STM32VDD on PWR Plane "STM32VDD_L03_P492" (solid, remove dead copper, pour order 492): 143.383,144.526 82.169,144.526 82.169,135.001 143.383,135.001
24Vin on PWR Plane "24VIN_L03_P493" (solid, pour order 493): 28.448,58.928 28.448,43.815 34.544,37.719 102.997,37.719 102.997,58.928
STM32VDD on PWR Plane "STM32VDD_L03_P494" (solid, pour order 494): 141.351,82.677 57.912,82.677 57.912,75.438 141.351,75.438
24Vin on PWR Plane "24VIN_L03_P495" (solid, remove dead copper, pour order 495): 86.995,58.928 86.995,37.719 155.702,37.719 164.084,46.101 164.084,58.928
5V on PWR Plane "5V_L03_P497" (solid, remove dead copper, pour order 497): 67.31,101.981 67.31,125.73 67.31,155.067 68.326,156.083 152.273,156.083 152.908,155.448 152.908,147.066 152.4,146.558 81.026,146.558 81.026,124.333 71.755,115.062 71.755,101.981
5V on PWR Plane "5V_L03_P500" (solid, remove dead copper, pour order 500): 75.819,120.65 109.982,120.65 109.982,129.159 106.553,132.588 75.819,132.588
STM32VDD on PWR Plane "STM32VDD_L03_P503" (solid, remove dead copper, pour order 503): 104.902,144.526 104.902,136.398 122.047,119.253 143.891,119.253 143.891,144.526
24Vin on PWR Plane "24VIN_L03_P523" (solid, remove dead copper, pour order 523): 44.577,95.123 44.069,94.615 44.069,93.726 44.958,92.837 44.958,83.185 50.8,83.185 50.8,91.202 46.582,95.123
REG_SUPPLY_5V on PWR Plane "REG_SUPPLY_5V_L03_P526" (solid, remove dead copper, pour order 526): 28.448,89.027 29.21,88.265 31.369,88.265 39.497,96.393 54.229,96.393 57.785,92.837 60.579,92.837 60.579,101.219 30.861,101.219 28.448,98.806
24Vin on PWR Plane "24VIN_L03_P586" (solid, remove dead copper, pour order 586): 85.144,73.897 84.89,73.643 84.89,55.228 89.154,55.228 89.154,71.919 87.176,73.897
24Vin on PWR Plane "24VIN_L03_P587" (solid, remove dead copper, pour order 587): 55.68,72.373 55.245,71.938 55.245,53.704 59.69,53.704 59.69,70.395 57.712,72.373
24Vin on PWR Plane "24VIN_L03_P589" (solid, remove dead copper, pour order 589): 115.624,74.405 115.37,74.151 115.37,55.736 119.634,55.736 119.634,72.427 117.656,74.405
24Vin on PWR Plane "24VIN_L03_P590" (solid, remove dead copper, pour order 590): 144.961,74.405 144.707,74.151 144.707,55.736 148.971,55.736 148.971,72.427 146.993,74.405
NetD14_2_1 on PWR Plane "NETD14_2_1_L03_P592" (solid, remove dead copper, pour order 592): 70.104,61.976 69.469,62.611 69.469,63.627 71.501,65.659 75.438,65.659 79.883,70.104 79.883,71.12 80.264,71.501 80.899,71.501 81.28,71.12 81.28,65.024 78.232,61.976
NetD14_1_1 on PWR Plane "NETD14_1_1_L03_P593" (solid, remove dead copper, pour order 593): 41.021,60.833 40.259,60.833 40.005,61.087 40.005,63.881 40.513,64.389 46.228,64.389 49.657,67.818 49.657,69.215 50.673,70.231 51.943,70.231 52.451,69.723 52.451,63.881 49.403,60.833
NetD14_3_1 on PWR Plane "NETD14_3_1_L03_P594" (solid, remove dead copper, pour order 594): 101.092,61.976 99.949,63.119 99.949,64.135 101.981,66.167 105.918,66.167 110.363,70.612 110.363,71.628 110.744,72.009 111.379,72.009 111.76,71.628 111.76,65.532 108.204,61.976
NetD14_4_1 on PWR Plane "NETD14_4_1_L03_P595" (solid, remove dead copper, pour order 595): 130.429,61.976 129.286,63.119 129.286,64.135 131.318,66.167 135.255,66.167 139.7,70.612 139.7,71.628 140.081,72.009 140.716,72.009 141.097,71.628 141.097,65.532 137.541,61.976
24Vin on PWR Plane "24VIN_L03_P596" (solid, remove dead copper, pour order 596): 117.856,55.753 93.98,55.753 93.091,56.642 93.091,57.785 94.996,59.69 117.856,59.69
24Vin on PWR Plane "24VIN_L03_P599" (solid, remove dead copper, pour order 599): 87.376,55.118 63.627,55.118 62.611,56.134 62.611,57.277 64.516,59.182 87.376,59.182
24Vin on PWR Plane "24VIN_L03_P600" (solid, remove dead copper, pour order 600): 57.912,53.721 34.036,53.721 33.147,54.61 33.147,55.753 35.052,57.658 57.912,57.658
24Vin on PWR Plane "24VIN_L03_P602" (solid, remove dead copper, pour order 602): 117.856,55.753 93.98,55.753 93.091,56.642 93.091,57.785 94.996,59.69 117.856,59.69
24Vin on PWR Plane "24VIN_L03_P603" (solid, remove dead copper, pour order 603): 147.193,55.753 123.317,55.753 122.428,56.642 122.428,59.182 122.936,59.69 147.193,59.69
STM32VDD on PWR Plane "STM32VDD_L03_P636" (solid, remove dead copper, pour order 636): 57.658,76.708 57.658,89.535 59.563,91.44 60.325,91.44 61.468,92.583 61.468,114.3 61.976,114.808 65.913,114.808 66.294,114.427 66.294,76.708
STM32VDD on PWR Plane "STM32VDD_L03_P637" (solid, remove dead copper, pour order 637): 58.039,75.819 58.039,75.438 64.897,68.58 74.168,68.58 81.026,75.438 81.026,75.819
STM32VDD on PWR Plane "STM32VDD_L03_P638" (solid, remove dead copper, pour order 638): 85.598,77.216 94.234,68.58 104.013,68.58 112.649,77.216
STM32VDD on PWR Plane "STM32VDD_L03_P639" (solid, remove dead copper, pour order 639): 116.015,77.851 124.778,69.088 135.128,69.088 143.891,77.851
STM32VDD on PWR Plane "STM32VDD_L03_P641" (solid, remove dead copper, pour order 641): 59.944,74.168 59.944,81.788 53.34,81.788 40.64,69.088 40.64,66.421 41.91,65.151 46.228,65.151 47.625,66.548 47.625,68.453 53.34,74.168
24Vin on PWR Plane "24VIN_L03_P642" (solid, remove dead copper, pour order 642): 48.006,91.313 48.006,93.98 46.863,95.123 39.243,95.123 28.448,84.328 28.448,54.229 39.624,54.229 39.624,75.057 48.006,83.439
REG_SUPPLY_5V on PWR Plane "REG_SUPPLY_5V_L03_P643" (solid, remove dead copper, pour order 643): 57.302,107.442 59.944,107.442 60.579,106.807 60.579,99.949 51.054,99.949 51.054,101.194
24Vin on PWR Plane "24VIN_L03_P645" (solid, pour order 645): 50.8,83.185 50.8,80.518 39.624,69.342 36.068,69.342 36.068,74.295 44.958,83.185
NetD13_1 on PWR Plane "NETD13_1_L03_P665" (solid, pour order 665): 58.293,124.841 57.277,124.841 57.277,130.937 60.198,133.858 60.198,135.763 60.833,136.398 63.881,136.398 64.262,136.017 64.262,130.81
NetQ3_5 on PWR Plane "NETQ3_5_L03_P666" (solid, remove dead copper, pour order 666): 53.848,137.414 50.927,134.493 50.927,127.635 53.848,124.714 53.848,117.602 55.245,116.205 56.388,116.205 57.023,116.84 57.023,131.191 59.944,134.112 59.944,136.652 59.182,137.414
STM32VDD on PWR Plane "STM32VDD_L03_P697" (solid, remove dead copper, pour order 697): 115.443,97.155 132.207,97.155 135.763,100.711 135.763,130.683 143.891,130.683 143.891,77.851 115.443,77.851
FC_Batt on PWR Plane "FC_BATT_L03_P704" (solid, remove dead copper, pour order 704): 18 vertices, not listed, extent 28.956,105.791 52.832,141.986
"GSE PWR" on PWR Plane "GSE_PWR_L03_P708" (solid, remove dead copper, pour order 708): 32.131,155.956 54.991,155.956 57.404,153.543 57.404,145.796 63.119,140.081 63.119,138.303 62.611,137.795 53.213,137.795 49.911,141.097 45.339,141.097 43.815,142.621 28.956,142.621 28.956,152.781
STM32VDD on PWR Plane "STM32VDD_L03_P712" (solid, remove dead copper, pour order 712): 79.375,119.761 73.533,113.919 73.533,78.486 97.79,78.486 106.934,87.63 106.934,110.744 97.917,119.761
STM32VDD on PWR Plane "STM32VDD_L03_P713" (solid, remove dead copper, pour order 713): 105.791,81.153 114.427,89.789 122.682,89.789 122.682,84.074 119.761,81.153
STM32VDD on PWR Plane "STM32VDD_L03_P714" (solid, remove dead copper, pour order 714): 63.143,100.584 75.565,100.584 75.565,79.248 74.549,78.232 63.881,78.232 63.373,78.74
STM32VDD on PWR Plane "STM32VDD_L03_P715" (solid, remove dead copper, pour order 715): 115.062,126.111 115.062,115.697 117.856,112.903 123.317,112.903 131.572,121.158 131.572,122.809 128.27,126.111
STM32VDD on PWR Plane "STM32VDD_L03_P743" (solid, remove dead copper, pour order 743): 115.443,97.155 113.284,94.996 113.284,88.519 115.443,88.519
24Vin on PWR Plane "24VIN_L03_P744" (solid, remove dead copper, pour order 744): 50.8,55.753 62.484,55.753 63.119,56.388 63.119,58.928 58.674,63.373 55.245,63.373 50.8,58.928
24Vin on PWR Plane "24VIN_L03_P745" (solid, remove dead copper, pour order 745): 79.819,55.944 92.773,55.943 93.472,56.642 93.472,57.531 87.439,63.563 84.899,63.563 79.819,58.483
24Vin on PWR Plane "24VIN_L03_P746" (solid, remove dead copper, pour order 746): 110.268,57.118 123.222,57.118 123.92,57.817 123.92,58.706 117.888,64.738 115.348,64.738 110.268,59.658
24Vin on PWR Plane "24VIN_L03_P747" (solid, remove dead copper, pour order 747): 137.287,56.07 150.876,56.07 150.876,61.849 147.193,65.532 144.78,65.532 137.287,58.039
STM32VDD on PWR Plane "STM32VDD_L03_P748" (solid, remove dead copper, pour order 748): 133.604,127.889 133.604,120.142 135.89,117.856 137.795,117.856 137.795,127.889
VDDA3.3V_CLEAN on PWR Plane "VDDA3.3V_CLEAN_L03_P756" (solid, remove dead copper, pour order 756): 129.794,118.364 133.477,118.364 135.255,116.586 135.255,101.092 134.112,99.949 132.08,99.949 129.921,102.108 129.921,102.997 131.953,105.029 131.953,109.22 129.159,112.014 129.159,117.729 129.413,117.983

## Other copper
GND Plane:
  pour cut-out: 160.782,127.127 142.113,127.127 142.113,81.661 160.782,81.661 160.782,83.693 145.161,83.693 145.161,124.46 160.782,124.46
PWR Plane:
  pour cut-out: 40.132,92.583 39.37,91.821 39.37,91.059 40.894,89.535 44.45,89.535 45.085,90.17 45.085,91.186 43.688,92.583

## Silkscreen, mask and mechanical layers (free items; w line width, h text height)
Top Overlay:
  drawing of 28 lines, arcs and shapes, not listed
  text "Percy27@bu.edu" at 119.253,123.336 h1.2
  text "Tiphys1 Rev2" at 55.849,111.948 h1.8
  text "Type2 Fun" at 99.06,74.168 h1.52
  text "ArgoFC" at 32.235,67.837 h2.3 r90
Bottom Overlay:
  drawing of 404 lines, arcs and shapes, not listed
  text "Ad Astra" at 160.782,141.478 h2 r90
  text "Percy Chen" at 35.941,74.676 h1.52 r90
  text "Ksenia Suglobova" at 37.973,74.676 h1.52 r90
Mechanical 1:
  text "Remove this after most layout work finished and pouring GND plane at GND LAYER" at -24.265,186.443 h5
  text "Add Etherent Breakout" at 114.427,95.25 h1.2 r90

## Text inside footprints (layer, text, board x,y; h text height)
J1: Top Overlay "25" at 81.98,42.1 h1.02
J4: Top Overlay "25" at 100.48,148.1 h1.02
J5: Top Overlay "25" at 153.83,148.1 h1.02
J6: Top Overlay "25" at 135.48,42.1 h1.02
J9: Top Overlay "25" at 159.4,116.64 h1.02 r90